# EAGLE board lightboxschematic (EAGLE 9.2.0)
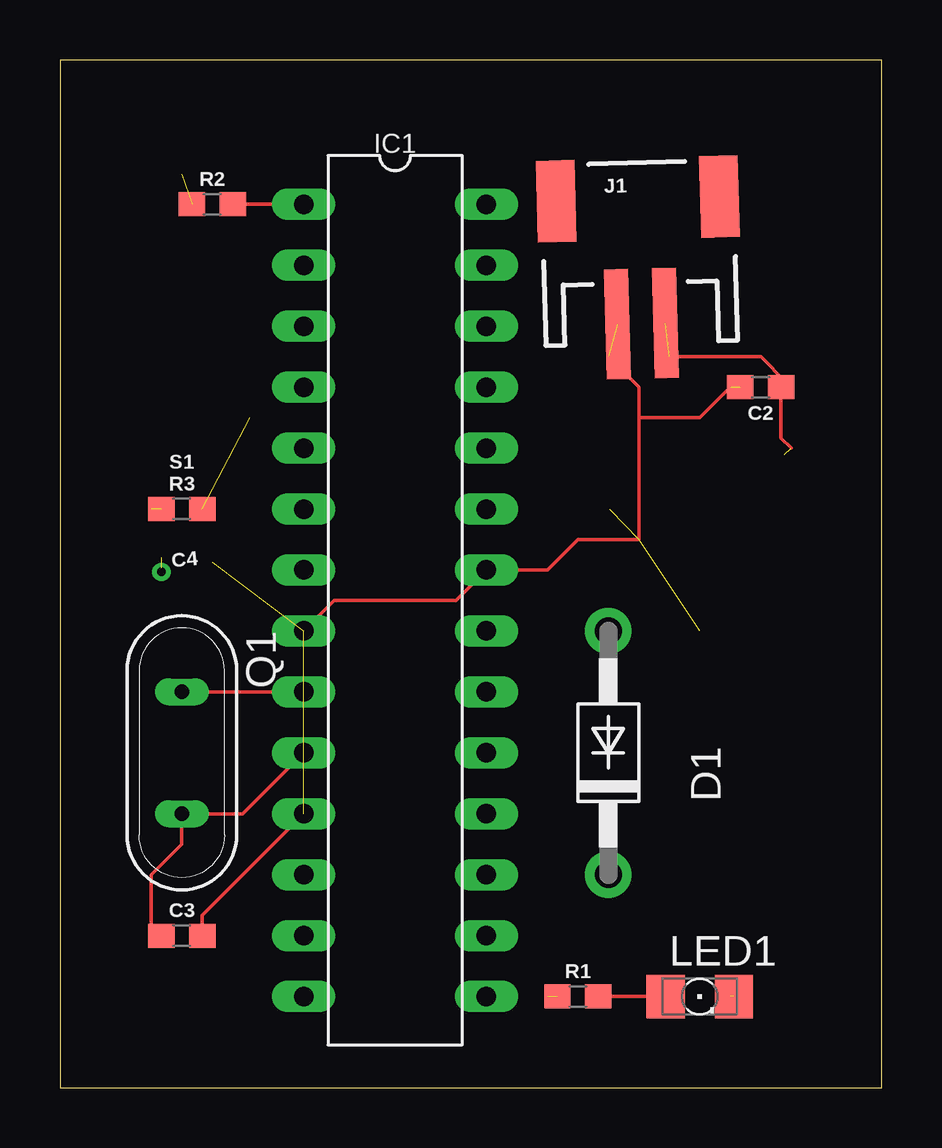
[diagram p0: board, top side]
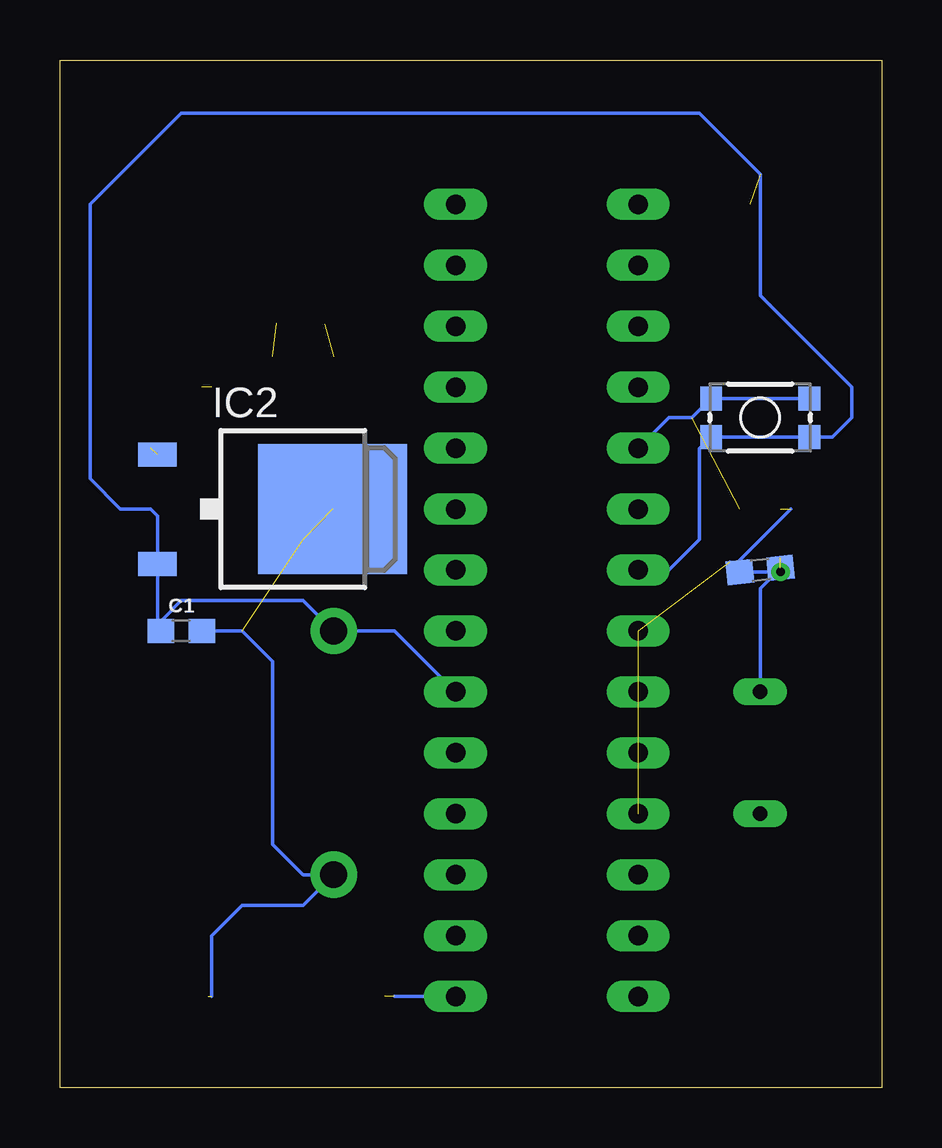
[diagram p1: board, bottom side, seen from below]

Size 34.27 x 42.85 mm. Coordinates in mm from the lower left corner, seen from the top.
Outline: 0,0 34.27,0 34.27,42.85 0,42.85 0,0
Copper layers (1*16): Top 0.035mm / dielectric 1.5mm / Bottom 0.035mm
Design rules "default": minimum track width 6mil, minimum drill 0.35mm, track to track 6mil, track to pad 6mil, pad to pad 6mil, via to via 6mil, smd to smd 6mil, copper to edge 40mil, drill to drill 6mil, minimum pad ring 10mil, minimum via ring 8mil, stop-mask expansion 4mil, vias tented up to drill 0mil, thermal gap 10mil

## Footprints (pad centres in the part's own frame; a part is rotated, then mirrored left to right if it is on the bottom)
0603 = smd 1.1 x 1: 1 -0.85,0; 2 0.85,0
DO41-10 = drill 1.118 pad 1.93: A 5.08,0; C -5.08,0
DIL28 = drill 0.813 long: 1 -3.81,16.51; 2 -3.81,13.97; 3 -3.81,11.43; 4 -3.81,8.89; 5 -3.81,6.35; 6 -3.81,3.81; 7 -3.81,1.27; 8 -3.81,-1.27; 9 -3.81,-3.81; 10 -3.81,-6.35; 11 -3.81,-8.89; 12 -3.81,-11.43; 13 -3.81,-13.97; 14 -3.81,-16.51; 15 3.81,-16.51; 16 3.81,-13.97; 17 3.81,-11.43; 18 3.81,-8.89; 19 3.81,-6.35; 20 3.81,-3.81; 21 3.81,-1.27; 22 3.81,1.27; 23 3.81,3.81; 24 3.81,6.35; 25 3.81,8.89; 26 3.81,11.43; 27 3.81,13.97; 28 3.81,16.51
TO252 = smd 1 x 1.6: 1 -2.28,-4.8; 2 2.28,-4.8 | smd 5.4 x 6.2: 3 0,2.5
JST-2-SMD = smd 1 x 4.6: 1 -1,-3.7; 2 1,-3.7 | smd 1.6 x 3.4: NC1 -3.4,1.5; NC2 3.4,1.5
1206 = smd 1.6 x 1.803: A -1.422,0; C 1.422,0
QS = drill 0.61 long: 1 -2.54,0; 2 2.54,0
TACTILE_SWITCH_SMD_4.6X2.8MM = smd 0.9 x 1: 1 -2.05,-0.8; 2 2.05,-0.8; 3 2.05,0.8; 4 -2.05,0.8

## Placement (x,y rotation side)
C1  10uF  [0603]  29.21,19.05 0 bottom
C2  10uF  [0603]  29.21,29.21 180 top
C3  22pF  [0603]  5.08,6.35 0 top
C4  22pF  [0603]  5.08,21.59 5.7 bottom
D1  1N4004  [DO41-10]  22.86,13.97 90 top
IC1  ATMEGA328-PU  [DIL28]  13.97,20.32 0 top
IC2  7808DT  [TO252]  25.4,24.13 270 bottom
J1  [JST-2-SMD]  24.13,35.56 1.6 top
LED1  [1206]  26.67,3.81 0 top
Q1  [QS]  5.08,13.97 270 top
R1  150  [0603]  21.59,3.81 0 top
R2  10k  [0603]  6.35,36.83 0 top
R3  100k  [0603]  5.08,24.13 0 top
S1  MOMENTARY-SWITCH-SPST-SMD-4.6X2.8MM  [TACTILE_SWITCH_SMD_4.6X2.8MM]  5.08,27.94 180 bottom

## Library data of the parts
C1 C2 = SparkFun-Capacitors; PROD_ID: CAP-11015
C3 C4 = SparkFun-Capacitors; PROD_ID: CAP-07876
D1 IC2 LED1 = adafruit
IC1 = ATMEGA328DIP-PU; DESCRIPTION: ATmega Series 20 MHz 32 KB Flash 2 KB SRAM 8-Bit Microcontroller - DIP-28; DIGI-KEY_PART_NUMBER: ATMEGA328-PU-ND; DIGI-KEY_PURCHASE_URL: https://www.digikey.com/product-detail/en/microchip-technology/ATMEGA328-PU/ATMEGA328-PU-ND/2271026?utm_source=snapeda&utm_medium=aggregator&utm_campaign=symbol; MF: Microchip; MP: ATMEGA328-PU; PACKAGE: PDIP-28 Microchip
J1 = SparkFun-Connectors; PROD_ID: CONN-11443
Q1 = special
R1 = SparkFun-Resistors; PROD_ID: RES-11028
R2 = SparkFun-Resistors; PROD_ID: RES-00824
R3 = SparkFun-Resistors; PROD_ID: RES-07828
S1 = SparkFun-Switches; PROD_ID: SWCH-13065

## Nets
5V: C1.1 D1.A IC1.7 IC1.20 IC2.2 R2.1 S1.3 S1.4
GND: C1.2 C2.2 C3.2 C4.1 D1.C IC1.8 IC1.11 IC1.22 IC2.3 J1.1 LED1.C R3.1
N$1: IC1.15 R1.1
N$2: LED1.A R1.2
N$3: C2.1 IC2.1 J1.2
N$4: IC1.5 R3.2 S1.1 S1.2
N$5: IC1.1 R2.2
N$6: C4.2 IC1.9 Q1.1
N$7: C3.1 IC1.10 Q1.2

## Tracks (layer width: path | path; a pad name or v marks a point on that pad's centre or on a via)
5V  (1 unrouted)
  Bottom 0.152: IC1.20 20.32,19.05 D1.A 24.13,20.32 29.21,20.32 30.06,19.47 C1.1 30.2,19.19 IC2.2 30.2,23.85 30.48,24.13 31.75,24.13 33.02,25.4 33.02,36.83 29.21,40.64 7.62,40.64 5.08,38.1 5.08,33.02 1.27,29.21 1.27,27.94 2.07,27.14 S1.4 S1.3 7.62,26.65 7.62,22.86 8.89,21.59 IC1.7
GND  (via drill 0.35)  (8 unrouted)
  Top 0.152: IC1.11 5.93,7.2 C3.2 | 24.13,27.94 24.13,22.86 21.59,22.86 20.32,21.59 IC1.22 16.51,20.32 11.43,20.32 IC1.8 | 22.86,30.48 24.13,29.21 24.13,27.94 | 24.13,27.94 26.67,27.94 27.94,29.21
  Bottom 0.152: 3.89,21.51 C4.1 | v4.23,21.51 C4.1 | C1.2 26.67,19.05 25.4,17.78 25.4,10.16 24.13,8.89 D1.C 24.13,7.62 26.67,7.62 27.94,6.35 27.94,3.81 | C4.1 6.18,21.76 | 6.18,21.76 6.35,21.93 | 6.18,21.76 | 3.81,24.13 6.18,21.76
N$1  (1 unrouted)
  Bottom 0.152: IC1.15 20.32,3.81
N$2
  Top 0.152: R1.2 LED1.A
N$3  (2 unrouted)
  Top 0.152: 30.48,29.63 30.27,29.42 | 30.27,29.42 C2.1 30.06,27.09 30.48,26.67 | 30.27,29.42 29.21,30.48 25.4,30.48
N$4  (1 unrouted)
  Bottom 0.152: IC1.5 8.89,27.94 7.93,27.94 S1.2 S1.1
N$5
  Top 0.152: R2.2 IC1.1
N$6  (1 unrouted)
  Top 0.152: Q1.1 IC1.9
  Bottom 0.152: 3.98,22.12 4.23,22.12 | C4.2 5.08,20.83 Q1.1
N$7
  Top 0.152: IC1.10 7.62,11.43 Q1.2 5.08,10.16 3.81,8.89 3.81,6.77 C3.1